# EAGLE board slimsata-2 (EAGLE 6.4)
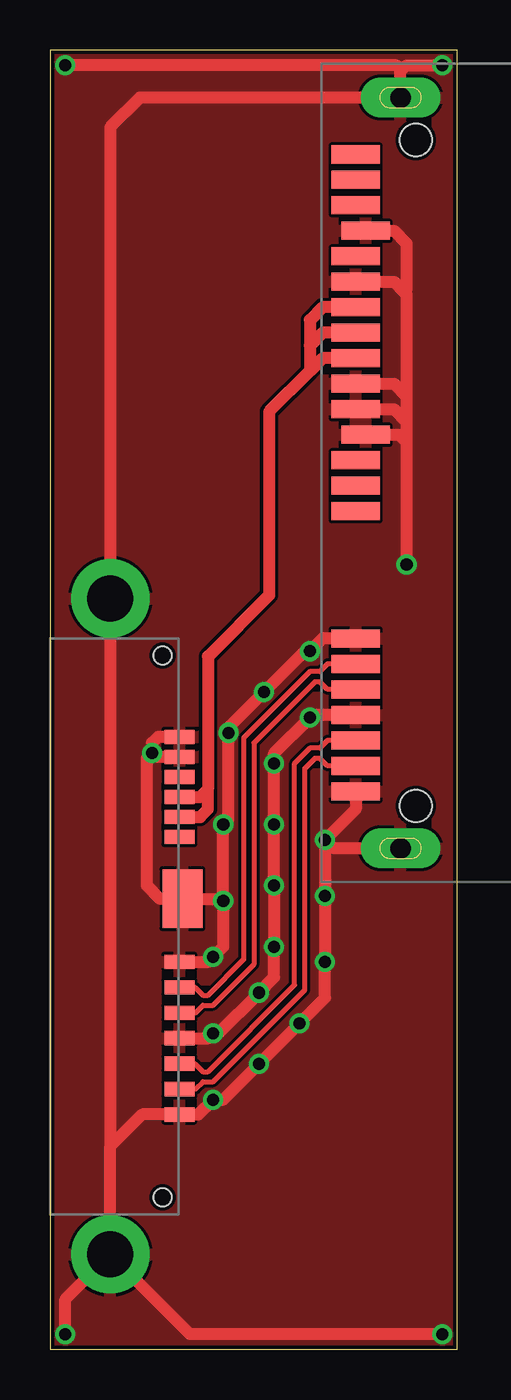
[diagram p0: board, top side]
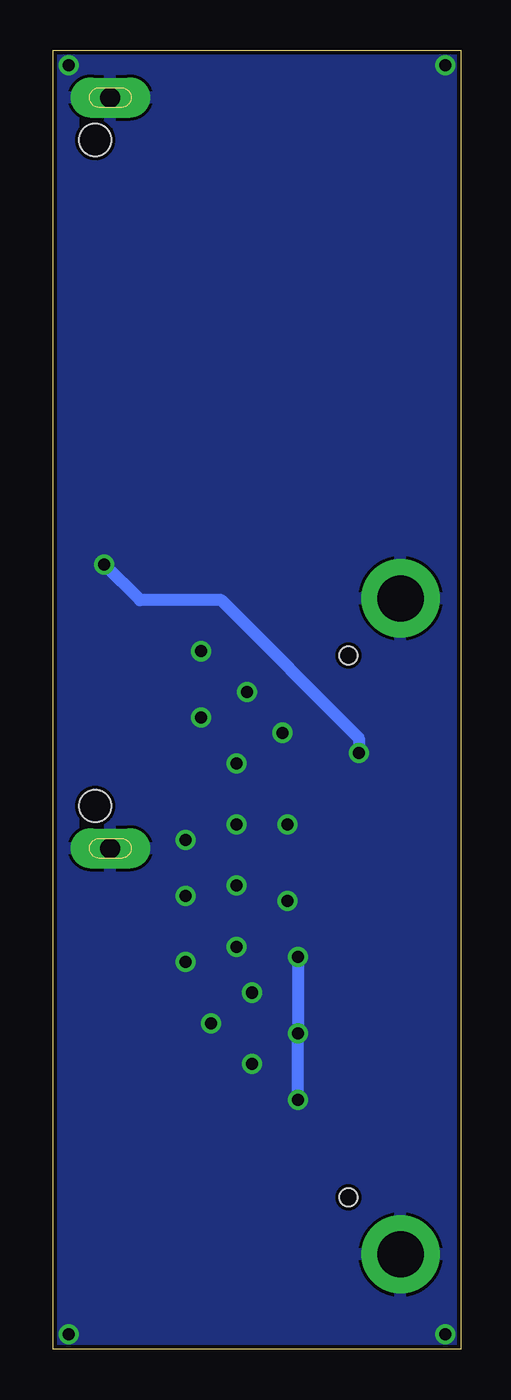
[diagram p1: board, bottom side, seen from below]

Size 20.32 x 64.76 mm. Coordinates in mm from the lower left corner, seen from the top.
Outline: 0,0 20.32,0 20.32,64.76 0,64.76 0,0
Copper layers (1*16): Top 0.035mm / dielectric 1.5mm / Bottom 0.035mm
Design rules "platinensammler_02_mod": minimum track width 0.15mm, minimum drill 0.3mm, track to track 0.15mm, track to pad 0.15mm, pad to pad 0.15mm, via to via 0.15mm, smd to smd 0mil, copper to edge 0.2mm, drill to drill 0.2mm, minimum pad ring 0.2mm, minimum via ring 0.2mm, stop-mask expansion 4mil, vias tented up to drill 0.8mm, thermal gap 0.15mm

## Footprints (pad centres in the part's own frame; a part is rotated, then mirrored left to right if it is on the bottom)
MOLEX_47018 = drill 1 pad 2 long: MECH1 -18.71,2.84; MECH2 18.71,2.84 | smd 0.9 x 2.4: P1 -1.905,5.08; P2 -0.635,5.08; P3 0.635,5.08; P4 1.905,4.58; P5 3.175,5.08; P6 4.445,5.08; P7 5.715,5.08; P8 6.985,5.08; P9 8.255,5.08; P10 9.525,5.08; P11 10.795,5.08; P12 12.065,4.58; P13 13.335,5.08; P14 14.605,5.08; P15 15.875,5.08; S1 -15.875,5.08; S2 -14.605,5.08; S3 -13.335,5.08; S4 -12.065,5.08; S5 -10.795,5.08; S6 -9.525,5.08; S7 -8.255,5.08 | hole 1.6: -16.595,2.08; 16.595,2.08
MOLEX_47300-1005 = drill 2.3 pad 3.9: MECH1 -16.35,3; MECH2 16.35,3 | smd 2.93 x 2: MECH3 -1.38,6.6 | smd 0.7 x 1.5: P1 -4.45,6.45; P2 -5.45,6.45; P3 -6.45,6.45; P4 -7.45,6.45; P5 -8.45,6.45; P6 -9.45,6.45; S1 9.38,6.45; S2 8.11,6.45; S3 6.84,6.45; S4 5.57,6.45; S5 4.3,6.45; S6 3.03,6.45; S7 1.76,6.45 | hole 0.9: -13.5,5.6; 13.5,5.6

## Placement (x,y rotation side)
CON1  [MOLEX_47018]  20.32,43.69 90 top
CON2  [MOLEX_47300-1005]  0,21.08 270 top

## Library data of the parts
CON1 CON2 = sata

## Nets
GND: CON1.MECH1 CON1.MECH2 CON1.P4 CON1.P5 CON1.P6 CON1.P10 CON1.P12 CON1.S1 CON1.S4 CON1.S7 CON2.MECH1 CON2.MECH2 CON2.MECH3 CON2.P5 CON2.P6 CON2.S1 CON2.S4 CON2.S7
N$3: CON1.P7 CON1.P8 CON1.P9 CON2.P2 CON2.P3
N$5: CON1.S2 CON2.S2
N$6: CON1.S3 CON2.S3
N$7: CON1.S5 CON2.S5
N$8: CON1.S6 CON2.S6

## Tracks (layer width: path | path; a pad name or v marks a point on that pad's centre or on a via)
GND  (via drill 0.6)
  Top 0.61: v13.72,25.4 v13.72,22.61 v13.72,19.3 13.72,17.53 v12.45,16.26 v10.41,14.22 8.64,12.45 v8.13,12.45 7.38,11.7 CON2.S1 4.59,11.7 3,10.11 | CON2.S4 7.89,15.51 v8.13,15.75 8.38,15.75 v10.41,17.78 11.18,18.54 v11.18,20.07 v11.18,23.11 v11.18,26.16 v11.18,29.21 11.18,29.72 v12.95,31.5 13.08,31.62 CON1.S4 | CON1.S1 15.24,26.92 v13.72,25.4 | CON1.MECH1 14.14,24.98 v13.72,25.4 | CON1.S7 13.59,35.43 v12.95,34.8 12.7,34.8 v10.67,32.77 8.89,30.99 v8.89,30.73 8.89,26.42 v8.64,26.16 v8.64,22.35 | CON2.P5 5.27,29.53 v5.08,29.72 | CON2.P6 5.39,30.53 5.08,30.23 v5.08,29.72 | CON2.MECH2 3,10.11 | v0.76,0.76 0.76,2.49 CON2.MECH2 | v19.56,0.76 6.97,0.76 CON2.MECH2 | CON1.MECH2 17.48,63.71 17.78,64.01 v19.56,64.01 | CON1.MECH2 17.48,63.8 17.27,64.01 v0.76,64.01 | CON1.P10 17.14,53.21 17.65,52.7 | 17.65,52.7 17.78,52.58 17.78,47.5 | 17.78,47.5 17.78,46.23 | 17.78,46.23 17.78,45.21 | 17.78,45.21 v17.78,39.12 | CON1.P6 17.14,48.13 17.78,47.5 | CON1.P5 17.14,46.86 17.78,46.23 | CON1.P4 17.4,45.59 17.78,45.21 | CON2.S7 7.89,19.32 v8.13,19.56 8.64,20.07 v8.64,22.35 | CON1.MECH2 4.49,62.4 3,60.91 CON2.MECH1 3,10.11 | CON1.P12 17.14,55.75 17.78,55.12 17.78,52.83 17.65,52.7 | v5.08,29.72 4.83,29.46 4.83,23.11 5.48,22.46 CON2.MECH3 8.53,22.46 v8.64,22.35
  Bottom 0.61: v8.13,19.56 v8.13,15.75 v8.13,12.45 | v17.78,39.12 16,37.34 11.94,37.34 5.08,30.48 v5.08,29.72
  pour Top: 0.25,0.25 20.07,0.25 20.07,64.52 0.25,64.52
  pour Bottom: 0.25,0.25 20.07,0.25 20.07,64.52 0.25,64.52
N$3
  Top 0.61: CON2.P3 7.47,27.53 7.87,27.94 | CON2.P2 7.48,26.53 7.87,26.92 7.87,27.94 | CON1.P9 13.59,51.94 12.95,51.31 12.95,50.04 | 12.95,50.04 12.95,48.77 | 12.95,48.77 10.92,46.74 10.92,37.59 7.87,34.54 7.87,27.94 | CON1.P8 13.59,50.67 12.95,50.04 | CON1.P7 13.59,49.4 12.95,48.77
N$5
  Top 0.254: CON2.S2 7.26,12.97 7.62,13.34 8.13,13.34 12.7,17.91 12.7,28.96 13.21,29.46 13.46,29.46 13.84,29.08 CON1.S2
N$6
  Top 0.254: CON2.S3 7.22,14.24 7.62,13.84 7.87,13.84 12.19,18.16 12.19,29.21 12.95,29.97 13.46,29.97 13.84,30.35 CON1.S3
N$7
  Top 0.254: CON2.S5 7.26,16.78 7.62,17.14 8.13,17.14 10.16,19.18 10.16,30.23 13.21,33.27 13.46,33.27 13.84,32.89 CON1.S5
N$8
  Top 0.254: CON2.S6 7.22,18.05 7.62,17.65 7.87,17.65 9.65,19.43 9.65,30.48 12.95,33.78 13.46,33.78 13.84,34.16 CON1.S6